# EAGLE board input-selector (EAGLE 7.7.0)
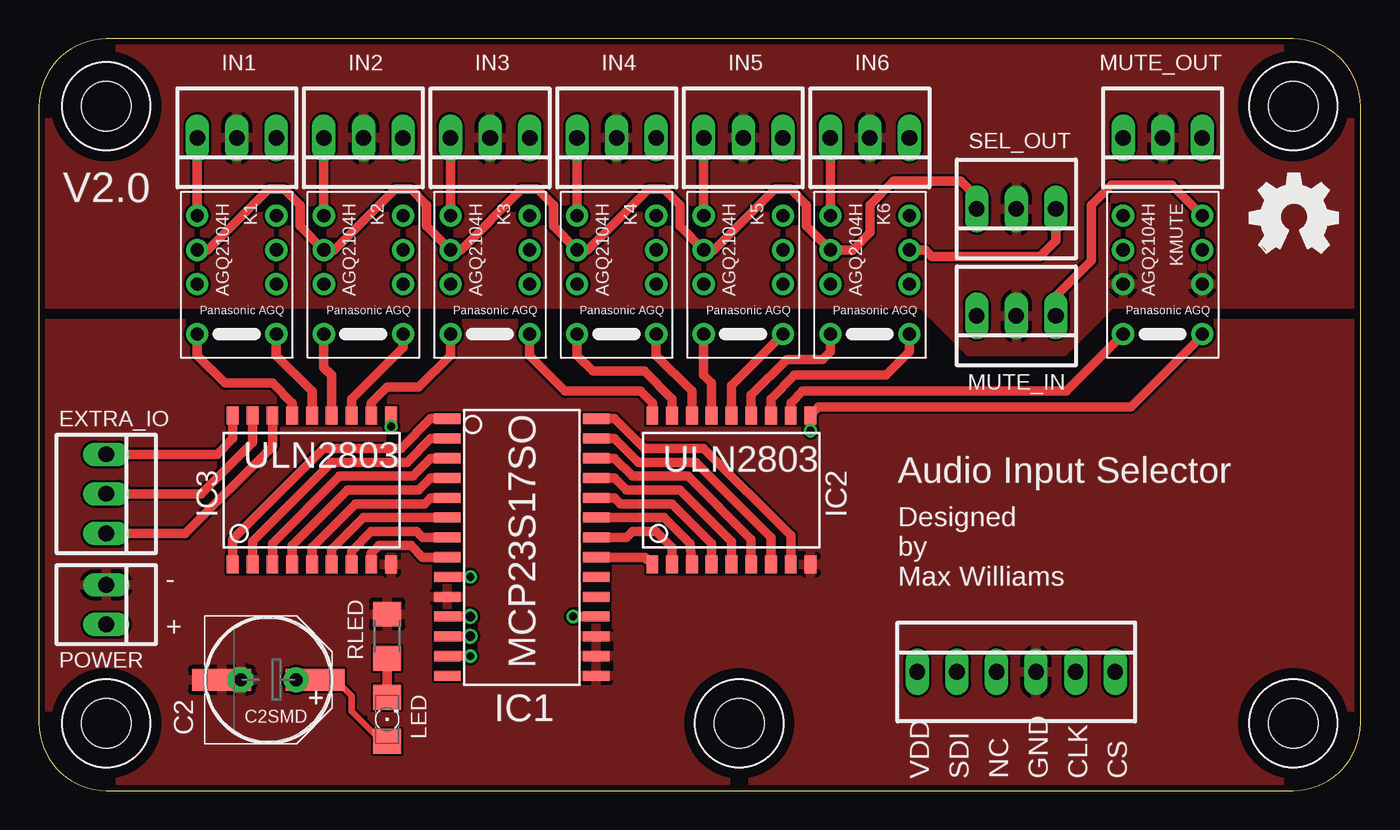
[diagram p0: board, top side]
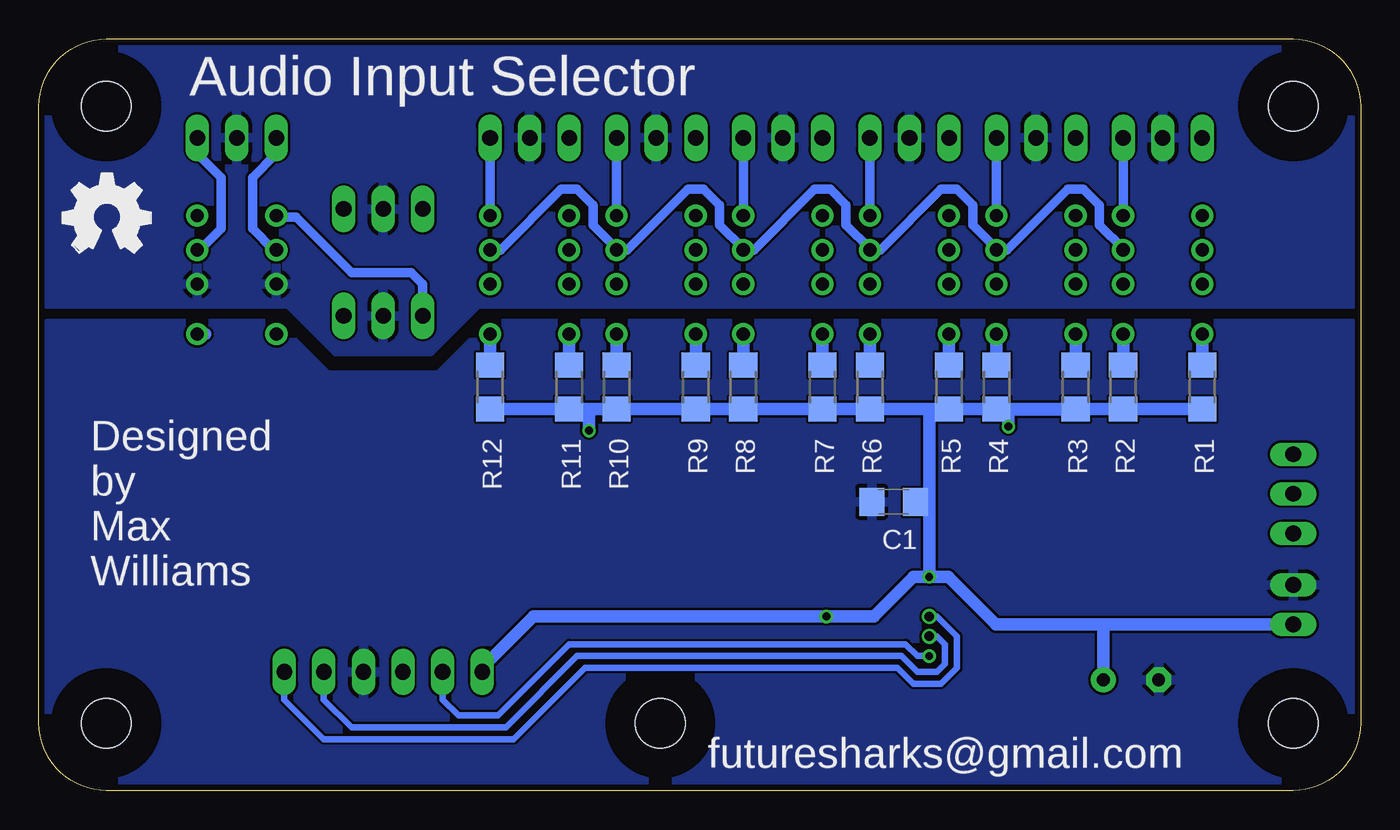
[diagram p1: board, bottom side, seen from below]

Size 84.84 x 48.26 mm. Coordinates in mm from the lower left corner, seen from the top.
Outline: 4.32,0 80.52,0 arc90 84.84,4.32 84.84,43.94 arc90 80.52,48.26 4.32,48.26 arc90 0,43.94 0,4.32 arc90 4.32,0
Copper layers (1*16): Top 0.0356mm / dielectric 1.5011mm / Bottom 0.0356mm
Design rules "LaenPCBOrder": minimum track width 6mil, minimum drill 13mil, track to track 6mil, track to pad 6mil, pad to pad 6mil, via to via 6mil, smd to smd 6mil, copper to edge 15mil, drill to drill 6mil, minimum pad ring 7mil, minimum via ring 7mil, stop-mask expansion 3mil, vias tented up to drill 0mil, thermal gap 10mil

## Footprints (pad centres in the part's own frame; a part is rotated, then mirrored left to right if it is on the bottom)
C1206 = smd 1.6 x 1.8: 1 -1.4,0; 2 1.4,0
E3,5-8 = drill 0.813 pad 1.6: + -1.778,0 | drill 0.813 pad 1.6 octagon: - 1.778,0
PANASONIC_E = smd 3.8 x 1.4: + 3,0; - -3,0
22-23-2031 = drill 1 long: 1 -2.54,0; 2 0,0; 3 2.54,0
SO28W = smd 0.65 x 1.7: 1 -7.62,-4.78; 2 -6.35,-4.78; 3 -5.08,-4.78; 4 -3.81,-4.78; 5 -2.54,-4.78; 6 -1.27,-4.78; 7 0,-4.78; 8 1.27,-4.78; 9 2.54,-4.78; 10 3.81,-4.78; 11 5.08,-4.78; 12 6.35,-4.78; 13 7.62,-4.78; 14 8.89,-4.78; 15 8.89,4.78; 16 7.62,4.78; 17 6.35,4.78; 18 5.08,4.78; 19 3.81,4.78; 20 2.54,4.78; 21 1.27,4.78; 22 0,4.78; 23 -1.27,4.78; 24 -2.54,4.78; 25 -3.81,4.78; 26 -5.08,4.78; 27 -6.35,4.78; 28 -7.62,4.78
SO-18W = smd 0.762 x 1.143: 1 -5.08,-4.788; 2 -3.81,-4.788; 3 -2.54,-4.788; 4 -1.27,-4.788; 5 0,-4.788; 6 1.27,-4.788; 7 2.54,-4.788; 8 3.81,-4.788; 9 5.08,-4.788; 10 5.08,4.788; 11 3.81,4.788; 12 2.54,4.788; 13 1.27,4.788; 14 0,4.788; 15 -1.27,4.788; 16 -2.54,4.788; 17 -3.81,4.788; 18 -5.08,4.788
PCBBOARD = drill 0.85 pad 1.422: 1 -2.54,3.2; 2 -2.54,0; 3 -2.54,-2.2; 4 -2.54,-4.4; 5 2.54,-4.4; 6 2.54,-2.2; 7 2.54,0; 8 2.54,3.2
1206 = smd 1.6 x 1.803: A -1.422,0; C 1.422,0
22-23-2021 = drill 1 long: 1 -1.27,0; 2 1.27,0
R1206 = smd 1.6 x 1.803: 1 -1.422,0; 2 1.422,0
M3_HOLE = hole 3.2: 0,0
22-23-2061 = drill 1 long: 1 -6.35,0; 2 -3.81,0; 3 -1.27,0; 4 1.27,0; 5 3.81,0; 6 6.35,0

## Placement (x,y rotation side)
C1  [C1206]  29.97,18.54 180 bottom
C2  [E3,5-8]  14.73,7.11 180 top
C2SMD  [PANASONIC_E]  14.73,7.11 0 top
EXTRA_IO  22-23-2031  [22-23-2031]  4.32,19.05 270 top
IC1  MCP23S17SO  [SO28W]  30.99,16.26 270 top
IC2  ULN2803  [SO-18W]  44.45,19.3 0 top
IC3  ULN2803  [SO-18W]  17.53,19.3 0 top
IN1  [22-23-2031]  12.7,41.91 180 top
IN2  [22-23-2031]  20.83,41.91 180 top
IN3  [22-23-2031]  28.96,41.91 180 top
IN4  [22-23-2031]  37.08,41.91 180 top
IN5  [22-23-2031]  45.21,41.91 180 top
IN6  [22-23-2031]  53.34,41.91 180 top
K1  AGQ2104H  [PCBBOARD]  12.7,32.51 180 top
K2  AGQ2104H  [PCBBOARD]  20.83,32.51 180 top
K3  AGQ2104H  [PCBBOARD]  28.96,32.51 180 top
K4  AGQ2104H  [PCBBOARD]  37.08,32.51 180 top
K5  AGQ2104H  [PCBBOARD]  45.21,32.51 180 top
K6  AGQ2104H  [PCBBOARD]  53.34,32.51 180 top
KMUTE  AGQ2104H  [PCBBOARD]  72.14,32.51 180 top
LED  [1206]  22.35,4.57 90 top
LOGO1  OSHW_LOGO_FILLX0200-NT  [OSHW_FILLX200_NOTEXT]  83.31,34.54 0 bottom
LOGO2  OSHW_LOGO_FILLX0200-NT  [OSHW_FILLX200_NOTEXT]  77.72,34.54 0 top
MUTE_IN  [22-23-2031]  62.74,30.48 180 top
MUTE_OUT  [22-23-2031]  72.14,41.91 180 top
POWER  22-23-2021  [22-23-2021]  4.32,11.94 270 top
R1  47R  [R1206]  10.16,25.91 90 bottom
R2  47R  [R1206]  15.24,25.91 90 bottom
R3  47R  [R1206]  18.29,25.91 90 bottom
R4  47R  [R1206]  23.37,25.91 90 bottom
R5  47R  [R1206]  26.42,25.91 90 bottom
R6  47R  [R1206]  31.5,25.91 90 bottom
R7  47R  [R1206]  34.54,25.91 90 bottom
R8  47R  [R1206]  39.62,25.91 90 bottom
R9  47R  [R1206]  42.67,25.91 90 bottom
R10  47R  [R1206]  47.75,25.91 90 bottom
R11  47R  [R1206]  50.8,25.91 90 bottom
R12  47R  [R1206]  55.88,25.91 90 bottom
RLED  2.4k  [R1206]  22.35,9.91 90 top
SEL_OUT  [22-23-2031]  62.74,37.34 180 top
U$1  [M3_HOLE]  4.32,43.94 0 top
U$2  [M3_HOLE]  4.32,4.32 0 top
U$3  [M3_HOLE]  44.96,4.32 0 top
U$4  [M3_HOLE]  80.52,4.32 0 top
U$5  [M3_HOLE]  80.52,43.94 0 top
X1  [22-23-2061]  62.74,7.62 0 top

## Library data of the parts
C1 C2 C2SMD R1-R12 RLED = rcl
EXTRA_IO IN1-IN6 MUTE_IN MUTE_OUT SEL_OUT = con-molex; MF: MOLEX; MPN: 22-23-2031; OC_FARNELL: 1462950; OC_NEWARK: 30C0862
IC1 = microchip; MF: MICROCHIP; MPN: MCP23S17-E/SO; OC_FARNELL: unknown; OC_NEWARK: 31K2950
IC2 IC3 = uln-udn-mine
K1-K6 KMUTE = panasonic-agq
LED = led
LOGO1 LOGO2 = ohw-logo
POWER = con-molex; MF: MOLEX; MPN: 22-23-2021; OC_FARNELL: 1462926; OC_NEWARK: 25C3832
U$1-U$5 = mouting-holes
X1 = con-molex; MF: MOLEX; MPN: 22-23-2061; OC_FARNELL: 1462922; OC_NEWARK: 27C1933

## Nets
+5V: C1.1 C2.+ C2SMD.+ IC1.9 IC1.18 IC2.10 IC3.10 KMUTE.1 LED.A POWER.2 R1.1 R2.1 R3.1 R4.1 R5.1 R6.1 R7.1 R8.1 R9.1 R10.1 R11.1 R12.1 X1.1
AGND: IN1.2 IN2.2 IN3.2 IN4.2 IN5.2 IN6.2 KMUTE.2 KMUTE.7 MUTE_IN.2 MUTE_OUT.2 SEL_OUT.2
CLK: IC1.12 X1.5
CS: IC1.11 X1.6
DGND: C1.2 C2.- C2SMD.- IC1.10 IC1.15 IC1.16 IC1.17 IC2.9 IC3.9 POWER.1 RLED.2 X1.4
INL: K1.3 K2.3 K3.3 K4.3 K5.3 K6.3 SEL_OUT.1
INR: K1.6 K2.6 K3.6 K4.6 K5.6 K6.6 SEL_OUT.3
N$1: IN1.1 K1.4
N$2: EXTRA_IO.2 IC3.17
N$3: IN1.3 K1.5
N$4: EXTRA_IO.3 IC3.16
N$5: IC3.15 K1.8 R1.2
N$6: IC2.11 KMUTE.8
N$7: IC1.21 IC2.1
N$8: IC3.14 K1.1 R2.2
N$9: IC3.13 K2.8 R3.2
N$10: EXTRA_IO.1 IC3.18
N$11: IC2.16 K4.1 R8.2
N$12: IC3.12 K2.1 R4.2
N$13: IC3.11 K3.8 R5.2
N$14: IC2.18 K3.1 R6.2
N$15: IC2.15 K5.8 R9.2
N$16: IC2.13 K6.8 R11.2
N$17: KMUTE.6 MUTE_OUT.3
N$18: KMUTE.3 MUTE_OUT.1
N$19: IC2.12 K6.1 R12.2
N$21: IC1.23 IC2.3
N$22: IC2.17 K4.8 R7.2
N$23: IC2.14 K5.1 R10.2
N$26: IN5.1 K5.4
N$27: IN5.3 K5.5
N$28: IN6.1 K6.4
N$29: IN6.3 K6.5
N$31: IN2.1 K2.4
N$32: IN2.3 K2.5
N$33: IN3.1 K3.4
N$34: IN3.3 K3.5
N$35: IN4.1 K4.4
N$36: IN4.3 K4.5
N$37: IC1.25 IC2.5
N$39: IC1.27 IC2.7
N$41: IC1.1 IC3.1
N$42: IC1.2 IC3.2
N$43: IC1.3 IC3.3
N$44: IC1.4 IC3.4
N$45: IC1.5 IC3.5
N$46: IC1.6 IC3.6
N$47: IC1.7 IC3.7
N$48: IC1.8 IC3.8
N$51: IC1.22 IC2.2
N$53: IC1.24 IC2.4
N$55: IC1.26 IC2.6
N$57: IC1.28 IC2.8
N$67: LED.C RLED.1
NC: X1.3
OUTL: KMUTE.4 MUTE_IN.1
OUTR: KMUTE.5 MUTE_IN.3
SDI: IC1.13 X1.2

## Tracks (layer width: path | path; a pad name or v marks a point on that pad's centre or on a via)
+5V  (via drill 0.5)
  Top 0.406: LED.A 22,3.15 20.07,5.08 20.07,6.1 19.05,7.11 C2SMD.+
  Top 0.61: IC3.10 v22.61,23.37 | IC2.10 v49.53,23.11 49.53,24.13 50.04,24.64 70.1,24.64 74.68,29.21 KMUTE.1 | IC1.9 v27.69,13.72 | IC1.18 v34.29,11.18
  Top 0.813: C2SMD.+ C2.+
  Bottom 0.61: R12.1 55.88,24.35 55.63,24.09 | C1.1 27.69,18.54 | R10.1 49.14,24.49 IC2.10 | R6.1 27.79,24.49 27.69,24.38 26.52,24.38 R5.1 | R4.1 23,24.49 IC3.10 | 22.61,24.38 18.39,24.38 R3.1
  Bottom 0.813: R1.1 R2.1 R3.1 R4.1 R5.1 R6.1 R7.1 R8.1 R9.1 R10.1 R11.1 R12.1 | v27.69,13.72 28.7,13.72 31.24,11.18 v34.29,11.18 53.09,11.18 56.39,7.87 X1.1 | v27.69,13.72 27.69,18.54 27.69,24.38 | v22.61,23.37 IC3.10 22.61,24.38 | v49.53,23.11 IC2.10 49.53,24.38 | POWER.2 16.51,10.67 | 16.51,10.67 23.41,10.67 26.46,13.72 v27.69,13.72 | 16.51,10.67 C2.+ | KMUTE.1 74.17,29.31
AGND
  pour Bottom: 0.51,47.75 0.51,31.24 56.64,31.24 59.69,28.19 65.79,28.19 68.83,31.24 84.33,31.24 84.33,47.75
  pour Top: 84.33,47.75 84.33,31.24 68.83,31.24 65.79,28.19 59.69,28.19 56.64,31.24 0.51,31.24 0.51,47.75
CLK  (via drill 0.6)
  Top 0.61: IC1.12 v27.69,9.91
  Bottom 0.406: v27.69,9.91 27.18,9.91 26.67,9.4 26.67,8.13 27.18,7.62 28.45,7.62 29.46,8.64 50.29,8.64 54.86,4.06 64.77,4.06 66.55,5.84 X1.5
CS  (via drill 0.6)
  Top 0.61: IC1.11 v27.69,11.18
  Bottom 0.406: v27.69,11.18 27.18,11.18 25.91,9.91 25.91,7.87 26.92,6.86 28.7,6.86 29.72,7.87 49.78,7.87 54.36,3.3 66.55,3.3 69.09,5.84 X1.6
DGND
  pour Bottom: 0.51,29.97 0.51,0.51 84.33,0.51 84.33,29.97 69.6,29.97 66.29,26.67 59.18,26.67 55.88,29.97
  pour Top: 0.51,29.97 0.51,0.51 84.33,0.51 84.33,29.97 69.85,29.97 66.04,26.16 59.44,26.16 55.37,29.97
INL
  Top 0.61: SEL_OUT.1 65.28,35.31 64.26,34.29 57.32,34.29 56.9,34.71 K6.3
  Bottom 0.61: K1.3 15.24,34.8 16.76,36.32 16.76,37.59 17.78,38.61 18.8,38.61 22.69,34.71 K2.3 23.37,34.8 24.89,36.32 24.89,37.59 25.91,38.61 26.92,38.61 30.82,34.71 K3.3 31.5,34.8 33.02,36.32 33.02,37.59 34.04,38.61 35.05,38.61 38.95,34.71 K4.3 39.62,34.8 41.15,36.32 41.15,37.59 42.16,38.61 43.18,38.61 47.08,34.71 K5.3 47.75,34.8 49.28,36.32 49.28,37.59 50.29,38.61 51.31,38.61 55.2,34.71 K6.3
INR
  Top 0.61: K1.6 10.84,34.71 14.73,38.61 15.75,38.61 16.76,37.59 16.76,36.24 K2.6 18.96,34.71 22.86,38.61 23.88,38.61 24.89,37.59 24.89,36.24 K3.6 27.09,34.71 30.99,38.61 32,38.61 33.02,37.59 33.02,36.24 K4.6 35.22,34.71 39.12,38.61 40.13,38.61 41.15,37.59 41.15,36.24 K5.6 43.35,34.71 47.24,38.61 48.26,38.61 49.28,37.59 49.28,36.24 K6.6 52.24,34.71 53.34,35.81 53.34,37.59 54.86,39.12 59.18,39.12 60.2,38.1 SEL_OUT.3
N$1
  Bottom 0.61: K1.4 IN1.1
N$2
  Top 0.61: IC3.17 13.72,22.35 10.41,19.05 EXTRA_IO.2
N$3
  Top 0.61: K1.5 IN1.3
N$4
  Top 0.61: IC3.16 14.99,22.1 9.4,16.51 EXTRA_IO.3
N$5
  Top 0.61: IC3.15 16.26,24.89 14.99,26.16 11.94,26.16 10.16,27.94 K1.8
  Bottom 0.813: R1.2 K1.8
N$6
  Top 0.61: IC2.11 48.26,24.89 49.02,25.65 65.94,25.65 KMUTE.8
N$7
  Top 0.61: IC1.21 38.9,14.99 IC2.1
N$8
  Top 0.61: IC3.14 17.53,25.65 15.24,27.94 K1.1
  Bottom 0.813: R2.2 K1.1
N$9
  Top 0.61: IC3.13 18.8,26.67 18.29,27.18 K2.8
  Bottom 0.813: R3.2 K2.8
N$10
  Top 0.61: IC3.18 12.45,22.61 11.43,21.59 EXTRA_IO.1
N$11
  Top 0.61: IC2.16 41.91,25.65 39.62,27.94 K4.1
  Bottom 0.813: R8.2 K4.1
N$12
  Top 0.61: IC3.12 20.07,25.15 23.37,28.45 K2.1
  Bottom 0.813: R4.2 K2.1
N$13
  Top 0.61: IC3.11 21.34,24.89 22.35,25.91 24.38,25.91 26.42,27.94 K3.8
  Bottom 0.813: R5.2 K3.8
N$14
  Top 0.61: IC2.18 39.37,24.89 38.61,25.65 33.78,25.65 31.5,27.94 K3.1
  Bottom 0.813: R6.2 K3.1
N$15
  Top 0.61: IC2.15 43.18,26.16 42.67,26.67 K5.8
  Bottom 0.813: R9.2 K5.8
N$16
  Top 0.61: IC2.13 45.72,25.4 48.01,27.69 50.29,27.69 50.8,28.19 K6.8
  Bottom 0.813: R11.2 K6.8
N$17
  Bottom 0.61: KMUTE.6 69.76,34.71 71.12,36.07 71.12,39.37 69.6,40.89 MUTE_OUT.3
N$18
  Bottom 0.61: KMUTE.3 74.51,34.71 73.15,36.07 73.15,39.37 74.68,40.89 MUTE_OUT.1
N$19
  Top 0.61: IC2.12 46.99,25.15 48.51,26.67 54.36,26.67 55.88,28.19 K6.1
  Bottom 0.813: R12.2 K6.1
N$21
  Top 0.61: IC2.3 41.78,15.88 40.13,17.53 IC1.23
N$22
  Top 0.61: IC2.17 40.64,25.15 38.86,26.92 35.56,26.92 34.54,27.94 K4.8
  Bottom 0.813: R7.2 K4.8
N$23
  Top 0.61: IC2.14 44.45,26.01 K5.1
  Bottom 0.813: R10.2 K5.1
N$26
  Bottom 0.61: K5.4 IN5.1
N$27
  Top 0.61: K5.5 IN5.3
N$28
  Bottom 0.61: K6.4 IN6.1
N$29
  Top 0.61: K6.5 IN6.3
N$31
  Bottom 0.61: K2.4 IN2.1
N$32
  Top 0.61: K2.5 IN2.3
N$33
  Bottom 0.61: K3.4 IN3.1
N$34
  Top 0.61: K3.5 IN3.3
N$35
  Bottom 0.61: K4.4 IN4.1
N$36
  Top 0.61: K4.5 IN4.3
N$37
  Top 0.61: IC2.5 44.45,16 41.15,19.3 37.72,19.3 36.96,20.07 IC1.25
N$39
  Top 0.61: IC2.7 46.99,16.26 42.16,21.08 38.48,21.08 36.96,22.61 IC1.27
N$41
  Top 0.61: IC3.1 12.45,16.13 18.29,21.97 23.24,21.97 25.15,23.88 IC1.1
N$42
  Top 0.61: IC3.2 13.72,16 18.8,21.08 23.62,21.08 25.15,22.61 IC1.2
N$43
  Top 0.61: IC3.3 14.99,15.88 19.3,20.19 24,20.19 25.15,21.34 IC1.3
N$44
  Top 0.61: IC3.4 16.26,15.75 19.81,19.3 24.38,19.3 25.15,20.07 IC1.4
N$45
  Top 0.61: IC3.5 17.53,15.62 20.32,18.41 24.77,18.41 25.15,18.8 IC1.5
N$46
  Top 0.61: IC3.6 18.8,15.49 20.83,17.53 IC1.6
N$47
  Top 0.61: IC3.7 20.07,15.37 21.34,16.64 24.26,16.64 24.64,16.26 IC1.7
N$48
  Top 0.61: IC3.8 21.34,15.24 21.84,15.75 23.88,15.75 24.64,14.99 IC1.8
N$51
  Top 0.61: IC2.2 40.64,15.62 39.62,16.64 38.1,16.64 37.72,16.26 IC1.22
N$53
  Top 0.61: IC2.4 43.18,15.88 40.64,18.41 37.34,18.41 36.96,18.8 IC1.24
N$55
  Top 0.61: IC2.6 45.72,16.13 41.66,20.19 38.1,20.19 36.96,21.34 IC1.26
N$57
  Top 0.61: IC2.8 48.26,16.38 42.67,21.97 38.86,21.97 36.96,23.88 IC1.28
N$67
  Top 0.61: RLED.1 LED.C
OUTL
  Top 0.61: MUTE_IN.1 65.28,31.75 67.56,34.04 67.56,37.59 68.83,38.86 72.73,38.86 KMUTE.4
OUTR
  Bottom 0.61: KMUTE.5 69.6,36.83 68.33,36.83 64.77,33.27 60.96,33.27 60.2,32.51 MUTE_IN.3
SDI  (via drill 0.5)
  Top 0.61: IC1.13 v27.69,8.64
  Bottom 0.406: X1.2 58.93,5.84 57.91,4.83 55.37,4.83 50.8,9.4 29.21,9.4 28.45,8.64 v27.69,8.64

## Text on the board
tNames: V2.0 | Audio Input Selector | - | Designed / by / Max Williams | + | VDD | SDI | NC | GND | CLK | CS
bNames: Audio Input Selector | Designed / by / Max / Williams | futuresharks@gmail.com